# Altium PCB PCB_LoRaTC_V1.PcbDoc
Units mm, origin at the board's own origin, x right, y up, seen from the top; angles counter-clockwise.
Board outline 100.06 x 93.82 mm, 2 copper layers (Top Layer, Bottom Layer); 81 components, 64 nets, 233 pads, 38 vias.
Unrouted connection lines stored in the file: 25.
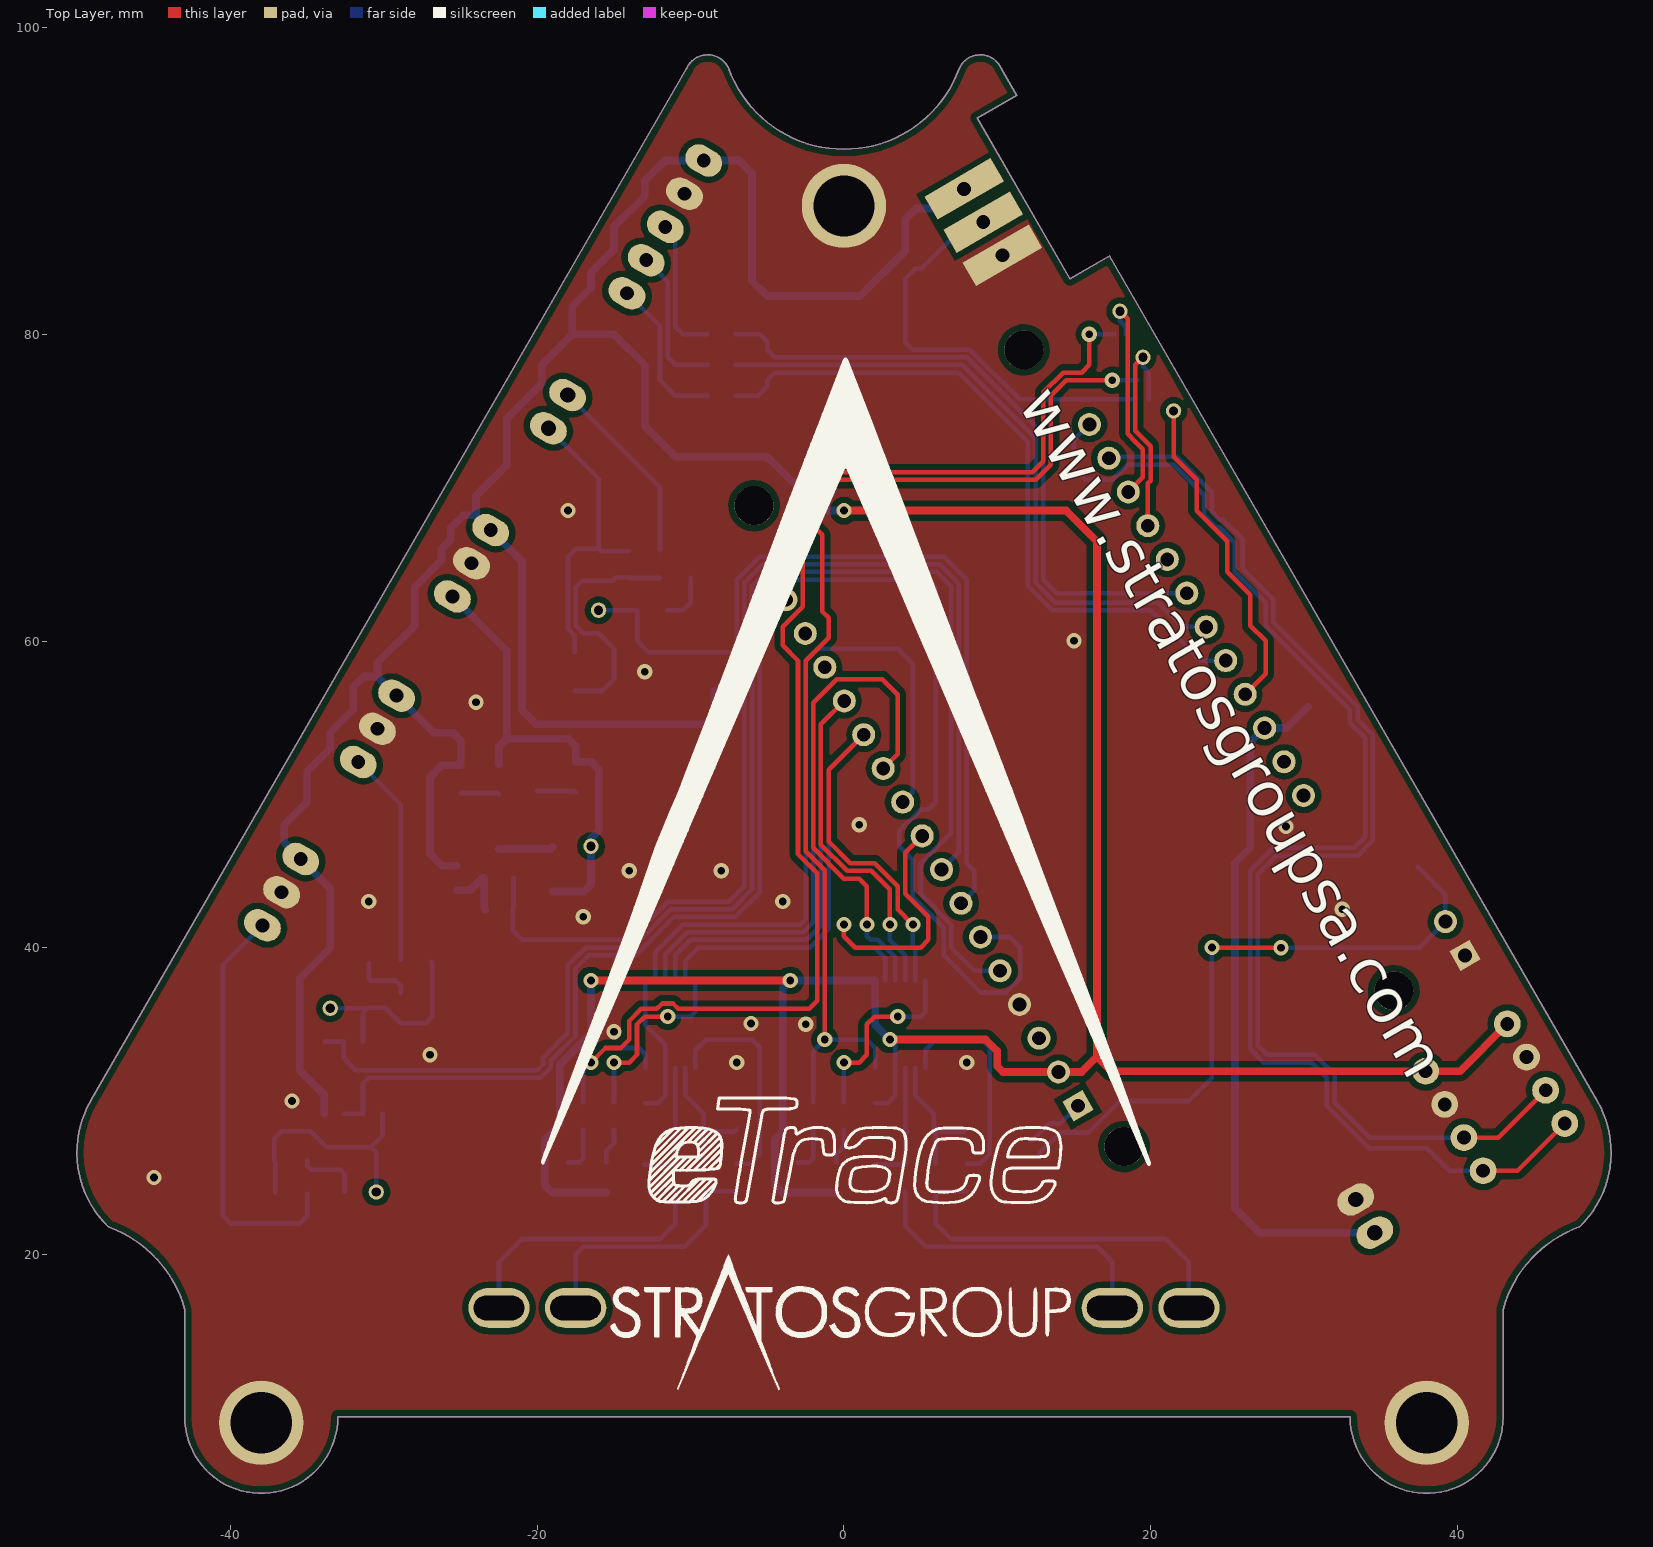
[diagram p0: Top Layer view]
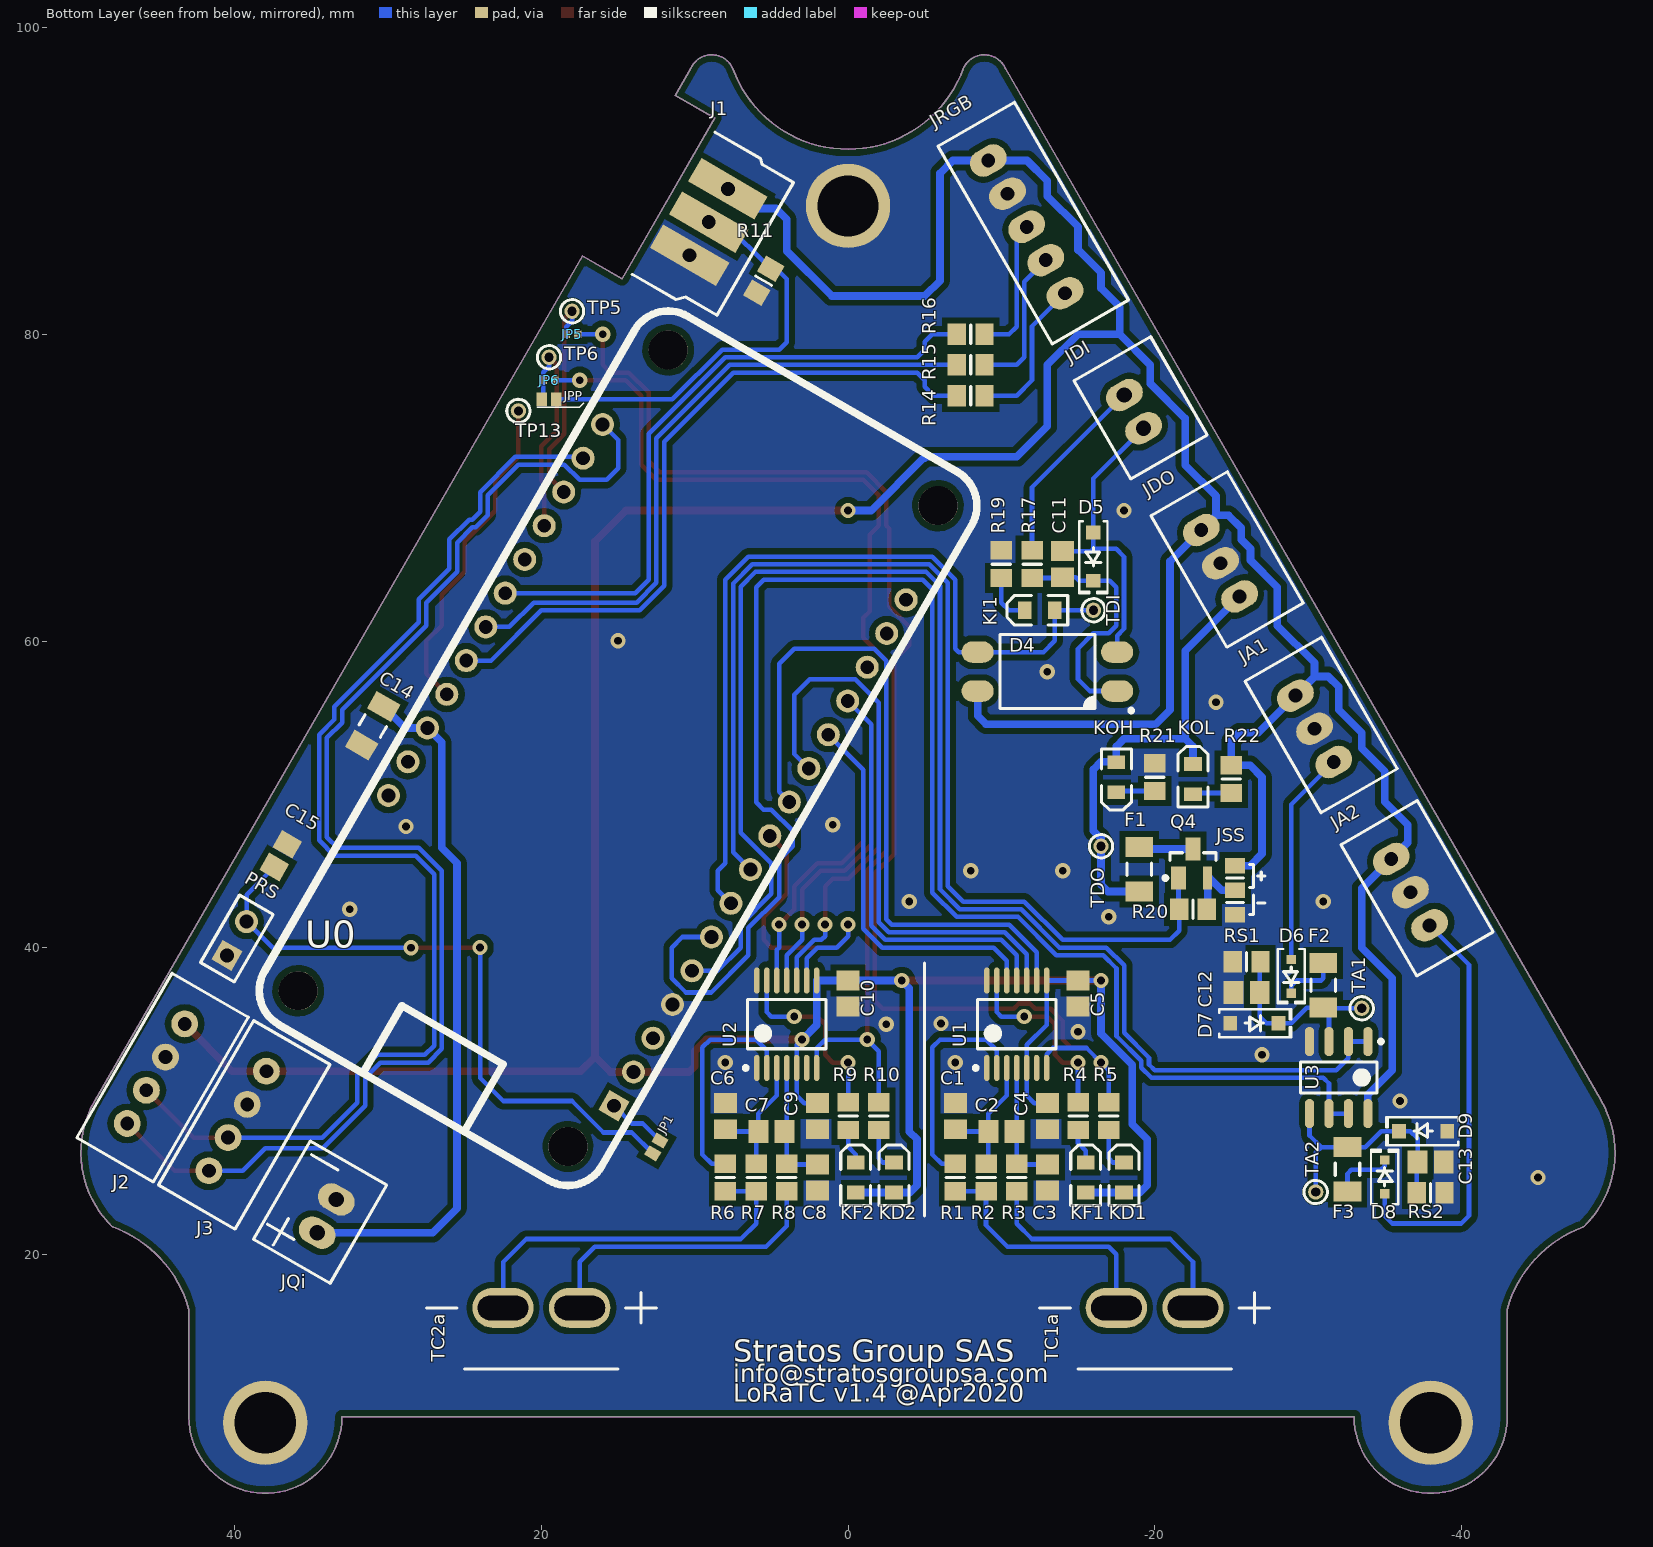
[diagram p1: Bottom Layer view, seen from below]

## Layer stack, top to bottom
Top Solder: solder mask 0.0102, Solder Resist, Dk 3.5
Top Layer: signal copper 0.0356
Dielectric 1: dielectric 0.32, FR-4, Dk 4.8
Bottom Layer: signal copper 0.0356
Bottom Solder: solder mask 0.0102, Solder Resist, Dk 3.5

## Board outline
-43,9.41 -43,16.41 -42.992,16.412 ccw(c-50.7,14.271) -47.964,21.788 cw(c-43.291,26.643) -49.136,29.997 -49.129,30.022 -10.266,97.335 cw(c-8.89,96.733) -7.518,97.343 ccw(c0,100.079) 7.517,97.343 7.514,97.335 cw(c8.89,96.733) 10.262,97.343 11.272,95.594 11.272,95.592 8.693,94.103 14.743,83.624 17.322,85.113 49.129,30.013 49.136,29.998 cw(c43.291,26.643) 47.965,21.789 47.963,21.797 ccw(c50.7,14.279) 42.989,16.41 42.989,9.399 cw(c38,9.399) 33.01,9.399 33,9.41 -33,9.41 cw(c-38,9.41)

## Design rules (kind name [scope] priority, off if disabled: settings)
Clearance Clearance_PolyGND [(InPolygon AND InNet('GND'))] p1: gap=0.4 ignorepadtopadclearanceinfootprint=FALSE except(0: Arc-Hole Track-Hole SMDPad-Hole THPad-Hole Via-Hole Fill-Hole Poly-Hole Region-Hole Text-Hole)
Clearance Clearance_RGBLed [HasFootprint('RGB_LED_5MM')] p2: gap=0.16 ignorepadtopadclearanceinfootprint=FALSE except(0: Arc-Hole Track-Hole SMDPad-Hole THPad-Hole Via-Hole Fill-Hole Poly-Hole Region-Hole Text-Hole)
Clearance Clearance_JSMD [HasFootprint('JUMPER SMD1')] p3: gap=0.15 ignorepadtopadclearanceinfootprint=FALSE
Clearance [All] p4: gap=0.2 ignorepadtopadclearanceinfootprint=FALSE except(0: Arc-Hole Track-Hole SMDPad-Hole THPad-Hole Via-Hole Fill-Hole Poly-Hole Region-Hole Text-Hole)
ComponentClearance ComponentClearance_I2CHeader [InComponent('J2') vs InComponent('J3')] p1: gap=0 collisioncheckmode=3 verticalgap=0 showdistances=FALSE
ComponentClearance ComponentClearance_TC1 [InComponent('TC1') vs InComponent('TC1a')] p2: gap=0 collisioncheckmode=3 verticalgap=0 showdistances=FALSE
ComponentClearance ComponentClearance_TC2 [InComponent('TC2') vs InComponent('TC2a')] p3: gap=0 collisioncheckmode=3 verticalgap=0 showdistances=FALSE
ComponentClearance ComponentClearance_J1 [InComponent('J1')] p4: gap=0 collisioncheckmode=3 verticalgap=0 showdistances=FALSE
ComponentClearance ComponentClearance_LoRa32u4II [InComponent('U0')] p5: gap=0 collisioncheckmode=3 verticalgap=0 showdistances=FALSE
ComponentClearance [All] p6: gap=0.254 collisioncheckmode=3 verticalgap=0.254 showdistances=FALSE
HoleSize [All] p1: absolutevalues=TRUE maxlimit=4 minlimit=0.3 maxpercent=80.000 minpercent=20.000
MinimumSolderMaskSliver [All] p1: minsoldermaskwidth=0
PolygonConnect [All] p1: connectstyle=Direct reliefconductorwidth=0.254 reliefentries=4 polygonreliefangle="90 Angle" airgapwidth=0.254
RoutingCorners [All] p1: cornerstyle=45-Degree minsetback=2.5 maxsetback=2.5
RoutingVias [All] p1: holewidth=0.5 width=1 viastyle="Through Hole" minholewidth=0.3 minwidth=0.6 maxholewidth=1 maxwidth=2
SilkToSilkClearance [All] p1 off: silktosilkclearance=0
SilkToSolderMaskClearance [IsPad] p1 off: minsilkscreentomaskgap=0 clearancetoexposedcopper=TRUE
SolderMaskExpansion [All] p1: expansion=0.102
Width Width_JSMD [HasFootprint('JUMPER SMD1')] p1: maxlimit=0.3 minlimit=0.15 preferedwidth=0.3
Width [All] p2: maxlimit=1 minlimit=0.1 preferedwidth=0.3
24 further rules are at their usual default settings.

## Classes and differential pairs
component class TC_Stage2: C6 C7 C8 C9 C10 KD2 KF2 R6 R7 R8 R9 R10 TC2a U2
component class TC_Stage1: C1 C2 C3 C4 C5 KD1 KF1 R1 R2 R3 R4 R5 TC1a U1
component class RGB_Status: JRGB R14 R15 R16
component class Main: C14 C15 J1 J2 J3 JP1 JP5 JP6 JPP JQi PRS R11 TP5 TP6 TP13 U0
component class Analog_Input: C12 C13 D6 D7 D8 D9 F2 F3 JA1 JA2 RS1 RS2 TA1 TA2 U3
component class Digital_Input_Output: C11 D4 D5 F1 JDI JDO JSS KI1 KOH KOL Q4 R17 R19 R20 R21 R22 TDI TDO
net class PWR: 5V DO1 GND NetF1_1 NetJSS_2

## Components (designator, comment, footprint, x,y, rotation, side; value= is the part's Value field where it differs from the comment)
C1 "Cap" CAPC2012N -7,29.01 r90 bottom value=0.01uF
C2 "Cap" CAPC2012N -10,28.01 r180 bottom value=0.1uF
C3 "Cap" CAPC2012N -13,25.01 r270 bottom value=0.01uF
C4 "Cap" CAPC2012N -13,29.01 r270 bottom value=0.1uF
C5 "Cap" CAPC2012N -15,37.01 r270 bottom value=0.1uF
C6 "Cap" CAPC2012N 8,29.01 r90 bottom value=0.01uF
C7 "Cap" CAPC2012N 5,28.01 r180 bottom value=0.1uF
C8 "Cap" CAPC2012N 2,25.01 r270 bottom value=0.01uF
C9 "Cap" CAPC2012N 2,29.01 r270 bottom value=0.1uF
C10 "Cap" CAPC2012N 0,37.01 r270 bottom value=0.1uF
C11 "Cap" CAPC2012N -14,65.01 r90 bottom value=0.1uF
C12 "Cap" CAPC2012N -26,37.08 r0 bottom value=0.1uF
C13 "Cap" CAPC2012N -38,26.032 r180 bottom value=0.1uF
C14 "Cap Tantalum" CAPC3216N 31,54.467 r300 bottom value=10uF/10V
C15 "Cap" CAPC2012N 37,46 r120 bottom value=0.1uF
D4 "Opto SMD" "LITEON LTV-817" -13,58.01 r0 bottom
D5 "5.1V@500mW" SOD-123 -16,65.51 r270 bottom
D6 "Rectifier SOD323" SOD323F -28.905,38.134 r270 bottom
D7 "3.3V@500mW" SOD-123 -26.5,35.08 r180 bottom
D8 "Rectifier SOD323" SOD323F -35,25.047 r90 bottom
D9 "3.3V@500mW" SOD-123 -37.5,28.032 r0 bottom
F1 "FUSE PTC 0.05A" RESC3216N -19,45.118 r270 bottom
F2 "FUSE PTC 0.05A" RESC3216N -31,37.547 r270 bottom
F3 "FUSE PTC 0.05A" RESC3216N -32.575,25.547 r90 bottom
J1 "TTP223" "JST XH B3B-XH-A"#1 9.085,87.327 r300 bottom
J2 "Si7021" "JST XH B4B-XH-A" 45.14,31.784 r120 bottom
J3 "Oled" "JST XH B4B-XH-A" 39.811,28.7 r120 bottom
JA1 "Header 2.54 mm" "JST XH B3B-XH-A"#2 -30.425,54.275 r60 bottom
JA2 "Header 2.54 mm" "JST XH B3B-XH-A"#2 -36.675,43.622 r60 bottom
JDI "Header 2.54 mm" "JST XH B2B-XH-A" -18.65,74.962 r60 bottom
JDO "Header 2.54 mm" "JST XH B3B-XH-A"#2 -24.29,65.075 r60 bottom
JP1 "Jumper SMD" "JUMPER SMD2"#1 12.5,27 r300 bottom
JP5 "Jumper SMD" "JUMPER SMD2"#2 18,80.01 r0 bottom
JP6 "Jumper SMD" "JUMPER SMD2"#2 19.5,77.01 r0 bottom
JPP "Jumper SMD" "JUMPER SMD2"#1 19.5,75.76 r0 bottom
JQi "Header 2.54 mm" "JST XH B2B-XH-A" 34,22.5 r300 bottom
JRGB "Header 5" "JST XH B5B-XH-A" -11.65,87.01 r60 bottom
JSS "Source selector" JumpRes_3a -25.25,43.743 r180 bottom
KD1 "LED_SMD" 2.0X1.25X1.2 -18,25.01 r90 bottom
KD2 "LED_SMD" 2.0X1.25X1.2 -3,25.01 r90 bottom
KF1 "LED_SMD" 2.0X1.25X1.2 -15.5,25.01 r90 bottom
KF2 "LED_SMD" 2.0X1.25X1.2 -0.5,25.01 r90 bottom
KI1 "LED_SMD" 2.0X1.25X1.2 -12.5,62.01 r0 bottom
KOH "LED_SMD" 2.0X1.25X1.2 -17.5,51.118 r270 bottom
KOL "LED_SMD" 2.0X1.25X1.2 -22.5,50.993 r90 bottom
PRS "Reset Header" HDR1X2#1 40.5,39.5 r120 bottom
Q4 "MOSFET-P" SOT23-3N -22.5,45.493 r90 bottom
R1 "Res1" RESC2012N -7,25.01 r270 bottom value=0.0
R2 "Res1" RESC2012N -9,25.01 r270 bottom value=0.0
R3 "Res1" RESC2012N -11,25.01 r270 bottom value=0.0
R4 "Res1" RESC2012N -15,29.01 r90 bottom value=1k
R5 "Res1" RESC2012N -17,29.01 r90 bottom value=1k
R6 "Res1" RESC2012N 8,25.01 r270 bottom value=0.0
R7 "Res1" RESC2012N 6,25.01 r270 bottom value=0.0
R8 "Res1" RESC2012N 4,25.01 r270 bottom value=0.0
R9 "Res1" RESC2012N 0,29.01 r90 bottom value=1k
R10 "Res1" RESC2012N -2,29.01 r90 bottom value=1k
R11 "Res1" RESC2012N 5.5,83.5 r300 bottom value=100K
R14 "Res1" RESC2012N -8,76.01 r0 bottom value=1k
R15 "Res1" RESC2012N -8,78.01 r0 bottom value=1k
R16 "Res1" RESC2012N -8,80.01 r0 bottom value=1k
R17 "Res1" RESC2012N -12,65.01 r90 bottom value=4.7k
R19 "Res1" RESC2012N -10,65.01 r90 bottom value=1k
R20 "Res1" RESC2012N -22.5,42.493 r180 bottom value=100K
R21 "Res1" RESC2012N -20,51.118 r270 bottom value=1K
R22 "Res1" RESC2012N -25,50.993 r90 bottom value=1K
RS1 "Res1" RESC2012N -26,39.08 r0 bottom value="100 0.1%"
RS2 "Res1" RESC2012N -38,24.032 r180 bottom value="100 0.1%"
TA1 "Test Point" "TESTPOINT_1 - THT" -33.5,36.047 r180 bottom
TA2 "Test Point" "TESTPOINT_1 - THT" -30.5,24.067 r180 bottom
TC1a "Terminal Block 5mm" HDR1X2#2 -22.5,16.51 r0 bottom
TC2a "Terminal Block 5mm" HDR1X2#2 17.5,16.51 r0 bottom
TDI "Test Point" "TESTPOINT_1 - THT" -16,62.01 r180 bottom
TDO "Test Point" "TESTPOINT_1 - THT" -16.5,46.618 r0 bottom
TP5 "Test Point" "TESTPOINT_1 - THT" 18,81.51 r180 bottom
TP6 "Test Point" "TESTPOINT_1 - THT" 19.5,78.51 r180 bottom
TP13 "Test Point" "TESTPOINT_1 - THT" 21.5,75.01 r180 bottom
U0 "LoRa32u4 II" LoRa32u4_II 15,53.01 r30 bottom
U1 "MAX31856" TSSOP14_N -11,35.01 r90 bottom
U2 "MAX31856" TSSOP14_N 4,35.01 r90 bottom
U3 "LM358DR" D008_L -32,31.532 r270 bottom

## Footprints (in the part's own frame and the unit in brackets; to place one, negate y for a bottom-side part, rotate by r counter-clockwise, add the part's x,y. Pads: shape width x height; smd on the part's side, far side on the other; paste and mask are expansions set on the pad)
2.0X1.25X1.2 [mm] "SM LED; 2 Flat Leads"
  rect 0.9x1.15 smd: 1(-0.98,0) 2(0.98,0)
  silkscreen extent -1.83,-0.98 2.13,0.98
CAPC2012N [mm] "Chip Capacitor, Body 2.0x1.3mm, IPC Medium Density"
  rect 1.3x1.5 smd: 1(-0.85,0) 2(0.85,0)
  body extent -1.1,-0.72 1.1,0.73, height 1.1
CAPC3216N [mm] "Chip Capacitor, Body 3.2x1.6mm, IPC Medium Density"
  rect 1.3x1.8 smd: 1(-1.45,0) 2(1.45,0)
  silkscreen extent -0.4,-0.8 0.4,0.8, body extent -1.7,-0.9 1.7,0.9, height 1.35
D008_L [mm] "SOIC, 8-Leads, Body 4.9x3.9mm, Pitch 1.27mm, IPC High Density"
  oval 1.9x0.6 smd: 1(-2.35,1.905) 2(-2.35,0.635) 3(-2.35,-0.635) 4(-2.35,-1.905) 5(2.35,-1.905) 6(2.35,-0.635) 7(2.35,0.635) 8(2.35,1.905)
  silkscreen extent -2.47,-2.5 1,2.88, body extent -2,-2.5 2,2.5, height 1.75
HDR1X2#1 [mm] "Connector; Header; 2 Position"
  rect 1.5x1.5 hole 0.9: 1(0,0)
  round 1.5 hole 0.9: 2(2.54,0)
  silkscreen extent -1.27,-1.27 3.81,1.27
HDR1X2#2 [mm] "Connector; Header; 2 Position"
  oval 4x2.6 hole 1.6 slot 3.3 at 0 deg: 1(0,0) 2(5,0)
  silkscreen extent -2.5,4 7.5,4
"JST XH B2B-XH-A" [mm]
  oval 1.75x2.5 hole 1: 1(-1.25,0) 2(1.25,0)
  silkscreen extent -3.7,-3.38 3.7,2.38, body extent -3.7,-3.37 3.7,2.38, height 7
"JST XH B3B-XH-A"#1 [mm]
  rect 1.75x5 hole 0.9: 1(-2.5,0) 2(0,0) 3(2.5,0)
  silkscreen extent -5.28,-2.62 5.45,3.5
"JST XH B3B-XH-A"#2 [mm]
  oval 1.75x2.5 hole 0.9: 1(-2.5,0) 2(0,0) 3(2.5,0)
  silkscreen extent -4.95,-3.38 4.95,2.38, body extent -4.95,-3.37 4.95,2.38, height 7
"JST XH B4B-XH-A" [mm]
  round 1.75 hole 0.9: 1(-3.75,0) 2(-1.25,0) 3(1.25,0) 4(3.75,0)
  silkscreen extent -6.2,-3.38 6.2,2.38, body extent -6.2,-3.37 6.2,2.38, height 7
"JST XH B5B-XH-A" [mm]
  oval 1.75x2.5 hole 0.9: 1(-5,0) 2(-2.5,0) 3(0,0) 4(2.5,0) 5(5,0)
  silkscreen extent -7.45,-3.38 7.45,2.38, body extent -7.45,-3.37 7.45,2.38, height 7
"JUMPER SMD2"#1 [mm] "JUMPER DE MONTAJE SUPERFICIAL"
  rect 0.7x0.9 smd: 1(-0.475,0) 2(0.475,0)
"JUMPER SMD2"#2 [mm] "JUMPER DE MONTAJE SUPERFICIAL"
  rect 0.5x0.5 smd: 1(-0.375,0) 2(0.375,0)
JumpRes_3a [mm] "Jumper Connection 2 Resistor SMD0805"
  rect 1.3x1 smd: 1(0,1.6) 2(0,0) 3(0,-1.6)
  silkscreen extent -0.55,-0.8 0.55,0.8, body extent -0.62,-0.2 0.63,1.8, height 0.78
"LITEON LTV-817" [mm] "SOP, 4-Leads, Body 4.60x6.50mm, Pitch 2.54mm, IPC Medium Density"
  oval 2.1x1.4 smd: 1(-4.55,1.27) 2(-4.55,-1.27) 3(4.55,-1.27) 4(4.55,1.27)
  silkscreen extent -5.59,-2.41 3.1,2.66, body extent -5.1,-2.3 5.1,2.3, height 3.85
LoRa32u4_II [mm] "LoRa32u4 II Module"
  round 2.54 hole 2.54: 0(-10.16,-24.13) 0(-10.16,24.13) 0(10.16,-24.13) 0(10.16,24.13)
  rect 1.5x1.5 hole 0.9: 1(-11.43,20.32)
  round 1.5 hole 0.9: 2(-11.43,17.78) 3(-11.43,15.24) 4(-11.43,12.7) 5(-11.43,10.16) 6(-11.43,7.62) 7(-11.43,5.08) 8(-11.43,2.54) 9(-11.43,0) 10(-11.43,-2.54) 11(-11.43,-5.08) 12(-11.43,-7.62) 13(-11.43,-10.16) 14(-11.43,-12.7) 15(-11.43,-15.24) 16(-11.43,-17.78) 17(11.43,-17.78) 18(11.43,-15.24) 19(11.43,-12.7) 20(11.43,-10.16) 21(11.43,-7.62) 22(11.43,-5.08) 23(11.43,-2.54) 24(11.43,0) 25(11.43,2.54) 26(11.43,5.08) 27(11.43,7.62) 28(11.43,10.16)
  silkscreen extent -12.7,-26.67 12.7,26.67
RESC2012N [mm] "Chip Resistor, Body 2.0x1.3mm, IPC Medium Density"
  rect 1.2x1.4 smd: 1(-0.9,0) 2(0.9,0)
  silkscreen extent 0,-0.6 0,0.6, body extent -1.08,-0.7 1.07,0.7, height 0.65
RESC3216N [mm] "Chip Resistor, Body 3.2x1.6mm, IPC Medium Density"
  rect 1.3x1.8 smd: 1(-1.45,0) 2(1.45,0)
  silkscreen extent -0.4,-0.8 0.4,0.8, body extent -1.68,-0.87 1.68,0.87, height 0.71
SOD323F [mm] "SODFL, 2-Leads, Body 1.25x2.50mm, IPC Medium Density"
  rect 0.6x0.6 smd: 1(-1.1,0) 2(1.1,0)
  silkscreen extent -1.78,-0.89 1.78,0.89, body extent -1.25,-0.62 1.25,0.63, height 0.8
SOD-123 [mm] "SOD, 2-Leads, Body 1.55x3.70mm, IPC Medium Density"
  rect 0.9x0.95 smd: 1(-1.575,0) 2(1.575,0)
  silkscreen extent -2.3,-0.92 2.41,0.92, body extent -1.86,-0.78 1.86,0.77, height 1.35
SOT23-3N [mm] "SOT23, 3-Leads, Body 2.9x1.3mm, Pitch 0.95mm, Lead Span 2.5mm, IPC Medium Density"
  rect 1.5x1 smd: 1(-0.95,0.95) 3(0.95,0)
  rect 1.5x0.6 smd: 2(-0.95,-0.95)
  silkscreen extent -1.07,-1.5 0.7,1.93, body extent -0.7,-1.5 0.7,1.5, height 1.1
"TESTPOINT_1 - THT" [mm] "Test Point Through Hole - Hole: 0.6 mm"
  round 1 hole 0.6: PAD(0,0)
  silkscreen extent -0.76,-0.76 0.76,0.76
TSSOP14_N [mm] "TSOP, 14-Leads, Body 5x4.4mm, Pitch 0.65mm, IPC Medium Density"
  oval 1.7x0.35 smd: 1(-2.85,1.95) 2(-2.85,1.3) 3(-2.85,0.65) 4(-2.85,0) 5(-2.85,-0.65) 6(-2.85,-1.3) 7(-2.85,-1.95) 8(2.85,-1.95) 9(2.85,-1.3) 10(2.85,-0.65) 11(2.85,0) 12(2.85,0.65) 13(2.85,1.3) 14(2.85,1.95)
  silkscreen extent -2.97,-2.55 1.6,2.8, body extent -2.25,-2.55 2.25,2.55, height 1.1

## Part data
C1 C3 C6 C8: "Capacitor", Supplier Part Number 1=1276-1015-1-ND, LatestRevisionDate=17-Jul-2002, LatestRevisionNote="Re-released for DXP Platform.", PackageDescription="Radial Cap, Thru-Hole; 2 Leads; 0.3 in Pin Spacing", PackageReference=RAD-0.3, Published=8-Jun-2000, Publisher="Altium Limited", Supplier 1=Digi-Key
C2 C4 C5 C7 C9 C10 C11 C12 C13 C15: "Capacitor", Supplier Part Number 1=1276-1007-1-ND, LatestRevisionDate=17-Jul-2002, LatestRevisionNote="Re-released for DXP Platform.", PackageDescription="Radial Cap, Thru-Hole; 2 Leads; 0.3 in Pin Spacing", PackageReference=RAD-0.3, Published=8-Jun-2000, Publisher="Altium Limited", Supplier 1=Digi-Key
C14: library part "Cap Pol2", "Polarized Capacitor (Axial)", Supplier Part Number 1=478-8193-1-ND, LatestRevisionDate=17-Jul-2002, LatestRevisionNote="Re-released for DXP Platform.", PackageDescription="Polarized Capacitor; 2 Leads", PackageReference=POLAR0.8, Published=8-Jun-2000, Publisher="Altium Limited", Supplier 1=Digi-Key
D4: library part Optoisolator
D5 D7 D9: library part "D Zener", "Zener Diode", LatestRevisionDate=17-Jul-2002, LatestRevisionNote="Re-released for DXP Platform.", PackageDescription="Diode, Thru-Hole; 2 Leads; 0.7 in Pin Spacing", PackageReference=DIODE-0.7, Published=8-Jun-2000, Publisher="Altium Limited", Supplier 1=Digi-Key
D6 D8: library part "Diode 1N4148", "High Conductance Fast Diode", Supplier Part Number 1=1N4148WSFSCT-ND, Code_JEDEC=DO-204-AH, ComponentLink1Description="Manufacturer Link", ComponentLink1URL=http://www.fairchildsemi.com/, ComponentLink2Description=Datasheet, ComponentLink2URL=http://www.fairchildsemi.com/ds/1N%2F1N4148.pdf, DatasheetVersion=1997, LatestRevisionDate=17-Jul-2002, LatestRevisionNote="Re-released for DXP Platform.", PackageDescription="Diode, Axial; Body 3.8 x 1.9 mm (LxDia. max), Lead Dia. 0.53 mm (max)", PackageReference=DO-35, Published=8-Jun-2000, Publisher="Altium Limited", Supplier 1=Digi-Key
F1 F2 F3: library part "Fuse 1", "FUSE PTC RESET 1.500A 24V 1812", Supplier Part Number 1=507-1793-1-ND, LatestRevisionDate=17-Jul-2002, LatestRevisionNote="Re-released for DXP Platform.", PackageDescription="Thru-Hole; 2 Leads", PackageReference=PIN-W2/E2.8, Published=8-Jun-2000, Publisher="Altium Limited", Supplier 1=Digi-Key
J1 JA1 JA2 JDO: library part "3 Pin"
J2 J3: library part "4 Pin"
JDI JQi: library part "2 Pin"
JRGB: "Header, 5-Pin", LatestRevisionDate=17-Jul-2002, LatestRevisionNote="Re-released for DXP Platform.", Publisher="Altium Limited"
JSS: library part Jump_Res3, "Jumper 2 positions"
KD1 KD2 KF1 KF2 KI1 KOH KOL: library part LED2, "Typical RED, GREEN, YELLOW, AMBER GaAs LED", Supplier Part Number 1=475-1410-1-ND, LatestRevisionDate=17-Jul-2002, LatestRevisionNote="Re-released for DXP Platform.", PackageDescription="SM LED; 2 Flat Leads", PackageReference=3.2X1.6X1.1, PackageVersion=Feb-2002, Published=8-Jun-2000, Publisher="Altium Limited", Supplier 1=Digi-Key
PRS TC1a TC2a: library part "Header 2", "Header, 2-Pin", LatestRevisionDate=17-Jul-2002, LatestRevisionNote="Re-released for DXP Platform.", Publisher="Altium Limited"
Q4: "P-Channel MOSFET", Supplier Part Number 1=DMP3099L-7DICT-ND, LatestRevisionDate=17-Jul-2002, LatestRevisionNote="Re-released for DXP Platform.", PackageDescription="TO, Flat Index; 3 In-Line, Axial Leads; Body Dia. 4.6mm; Lead Dia. 0.5 mm (max)", PackageReference=E3, PackageVersion=1995/1996, Published=8-Jun-2000, Publisher="Altium Limited", Supplier 1=Digi-Key
R1 R2 R3 R6 R7 R8: "Resistor", Supplier Part Number 1=CR0805-J/-000ELF, LatestRevisionDate=17-Jul-2002, LatestRevisionNote="Re-released for DXP Platform.", PackageDescription="Axial Device, Thru-Hole; 2 Leads; 0.3 in Pin Spacing", PackageReference=AXIAL-0.3, Published=8-Jun-2000, Publisher="Altium Limited", Supplier 1=Digi-Key
R4 R5 R9 R10 R14 R15 R16 R19: "Resistor", Supplier Part Number 1=P1.00KCCT-ND, LatestRevisionDate=17-Jul-2002, LatestRevisionNote="Re-released for DXP Platform.", PackageDescription="Axial Device, Thru-Hole; 2 Leads; 0.3 in Pin Spacing", PackageReference=AXIAL-0.3, Published=8-Jun-2000, Publisher="Altium Limited", Supplier 1=Digi-Key
R11 R20: "Resistor", Supplier Part Number 1=P100KCCT-ND, LatestRevisionDate=17-Jul-2002, LatestRevisionNote="Re-released for DXP Platform.", PackageDescription="Axial Device, Thru-Hole; 2 Leads; 0.3 in Pin Spacing", PackageReference=AXIAL-0.3, Published=8-Jun-2000, Publisher="Altium Limited", Supplier 1=Digi-Key
R17: "Resistor", Supplier Part Number 1=P4.70KCCT-ND, LatestRevisionDate=17-Jul-2002, LatestRevisionNote="Re-released for DXP Platform.", PackageDescription="Axial Device, Thru-Hole; 2 Leads; 0.3 in Pin Spacing", PackageReference=AXIAL-0.3, Published=8-Jun-2000, Publisher="Altium Limited", Supplier 1=Digi-Key
R21 R22: "Resistor", Supplier Part Number 1=P1.0KACT-ND, LatestRevisionDate=17-Jul-2002, LatestRevisionNote="Re-released for DXP Platform.", PackageDescription="Axial Device, Thru-Hole; 2 Leads; 0.3 in Pin Spacing", PackageReference=AXIAL-0.3, Published=8-Jun-2000, Publisher="Altium Limited", Supplier 1=Digi-Key
RS1 RS2: "Resistor", Supplier Part Number 1=RG20P100BCT-ND, LatestRevisionDate=17-Jul-2002, LatestRevisionNote="Re-released for DXP Platform.", PackageDescription="Axial Device, Thru-Hole; 2 Leads; 0.3 in Pin Spacing", PackageReference=AXIAL-0.3, Published=8-Jun-2000, Publisher="Altium Limited", Supplier 1=Digi-Key
TA1 TA2 TDI TDO TP5 TP6 TP13: library part TestPoint
U0: library part LoRa32u4_II_2, "Based on Adafruit Feather LoRa"
U1 U2: "Precision Thermocouple to Digital Converter with Linearization", Supplier Part Number 1=MAX31856MUD+-ND, Supplier 1=Digi-Key
U3: "Dual Operational Amplifier", Supplier Part Number 1=296-1014-1-ND, Code_IPC=SOIC127P600-8, ComponentLink1Description="Manufacturer Link", ComponentLink1URL=http://www.ti.com/, ComponentLink2Description=Datasheet, ComponentLink2URL=http://www-s.ti.com/sc/ds/lm358.pdf, DatasheetVersion=Aug-1988, LatestRevisionDate=13-Apr-2006, LatestRevisionNote="IPC-7351 Footprint Added.", PackageDescription="8-Pin Small Outline Integrated Circuit 1.27 mm Pitch", PackageReference=D008, PackageVersion=Jan-1998, Published=15-Apr-2002, Publisher="Altium Limited", Supplier 1=Digi-Key

## Free pads (board coordinates)
  round 5.5 hole 4: 0(-38,9.01) 0(0,88.379) 0(38,9.01)

## Via types
v1: diameter 1, hole 0.5, Top Layer to Bottom Layer, 38 vias

## Nets (pads, with @x,y where several pads share a name; then routed paths per layer and width w, separated by ;. In a path a pad name is that pad's centre, name@x,y a point inside that pad or via, vN(x,y) a via of type N, cw(c..) or ccw(c..) an arc to the next point about the centre after c; other vN are vias at no path point)
2: J2.1 J3.1 U0.17 | length 86.3
  Top Layer w0.3: J3.1 43.932,25.452 J2.1
  Bottom Layer w0.3: U0.17 15,73.114 15,71.26 15.75,70.51 17.5,70.51 18.5,71.51 21.5,71.51 23.5,69.51 23.5,68.217 24.293,67.424 24.5,67.424 25.5,66.424 25.5,64.51 27.5,62.51 27.5,61.01 33,55.51 33,55.091 33,54.677 33.99,53.687 33.99,47.207 33.293,46.51 28,46.51 26.5,45.01 26.5,33.401 27.391,32.51 30.5,32.51 31.5,31.51 31.5,29.693 34.262,26.931 38,26.931 39.478,25.452 J3.1
3: J2.2 J3.2 U0.18 | length 78.1
  Top Layer w0.3: J3.2 42.682,27.617 J2.2
  Bottom Layer w0.3: U0.18@17.279,71.923 17.365,72.01 21.707,72.01 24,69.717 24,68.424 24.5,67.924 24.707,67.924 26,66.631 26,64.717 28,62.717 28,61.217 33.5,55.717 33.5,54.884 34.49,53.894 34.49,47 33.5,46.01 28.207,46.01 27,44.803 27,33.608 27.598,33.01 30.707,33.01 32,31.717 32,29.9 34.282,27.617 J3.2
3V3: C4.1 C5.1 C9.1 C10.1 D4.4 J1.1 J2.4 J3.4 JA1.3 JA2.3 JDO.3 JRGB.5 JSS.1 KD1.1 KD2.1 KF1.1 KF2.1 R22.2 U0.2 U1.5 U1.8 U2.5 U2.8 U3.8 | length 351.6
  Top Layer w0.5: v1(-16.5,37.86) v1(-3.5,37.86) ; v1(0,68.51) 10,68.51 14.5,68.51 16.5,66.51 16.5,32.897 ; v1(3,34.01) 9.25,34.01 10,33.26 10,32.26 10.363,31.897 15.5,31.897 16.5,32.897 ; J2.4 40.182,31.948 J3.4 17.449,31.948 16.5,32.897
  Bottom Layer w0.3: v1(-16.5,37.86) C5.1 U1.8 -12.95,34.96 -11.65,33.66 U1.5 -11.65,30.36 -12.15,29.86 C4.1 ; C9.1 2.85,29.86 3.35,30.36 U2.5 v1@3.35,33.66
  Bottom Layer w0.5: U3.8 -33.905,30.415 -35.5,32.01 -35.5,38.01 -33.5,40.01 -33.5,43.863 JA2.3 -36.5,46.863 -36.5,48.01 -35,49.51 -35,51.51 -33.5,53.01 -33.5,54.01 -32,55.51 -32,57.01 -31.32,57.69 -30.425,57.69 ; JSS.1 -26.225,45.343 -27,46.118 -27,51.118 -26.225,51.893 R22.2 -25,53.51 -25.5,54.01 -26.745,54.01 JA1.3 -30.425,57.69 ; v1(-16.5,37.86) -16.5,34.402 -18.525,32.377 -18.525,28.485 -19.51,27.5 -19.51,24.52 -19.02,24.03 KD1.1 KF1.1 ; D4.4 -8.45,55.122 -9,54.572 -20.062,54.572 -21,55.51 -21,65.201 JDO.3 -24,68.201 ; KF2.1 KD2.1 -4.02,24.03 -4.5,24.51 -4.5,27.51 -4,28.01 -4,37.36 v1(-3.5,37.86) C10.1 U2.8 2.05,34.96 v1(3,34.01) ; v1(0,68.51) -1.5,68.51 -4.914,71.923 -5,71.923 -5.087,72.01 -11,72.01 -13,74.01 -13,78.01 -15,80.01 -17.71,80.01 ; J1.1 6.556,88.213 4.702,88.213 4,87.51 4,85.439 1.071,82.51 -5,82.51 -6,83.51 -6,90.51 -6.831,91.34 JRGB.5 -11.67,91.34 -13,90.01 -13,89.01 -15,87.01 -15,85.51 -16.5,84.01 -16.5,83.01 -17.71,81.801 -17.71,80.01 ; -30.425,57.69 -30.425,58.585 -28,61.01 -28,63.51 -26.25,65.261 -26.25,66.01 -25.635,66.625 -25.635,67.375 -24.809,68.201 -24,68.201 ; -24,68.201 -24,69.46 -22,71.46 -22,74.51 -19.714,76.796 -19.714,78.005 -17.71,80.01
5: JP5.2 TP5.PAD U0.19 | length 14.5
  Top Layer w0.3: TP5.PAD 18.5,81.01 18.5,73.51 19,73.01 19.5,72.51 19.5,70.674 U0.19@18.549,69.724
  Bottom Layer w0.3: TP5.PAD 18,80.885 18.375,80.51 JP5.2
5V: C14.1 JQi.2 U0.26 | length 45.3
  Bottom Layer w0.5: C14.1 28.878,54.326 U0.26 26.5,53.387 26.5,46.51 25.5,45.51 25.5,23 27.083,21.417 JQi.2
6: JP6.2 JPP.2 TP6.PAD U0.20 | length 14.6
  Top Layer w0.3: TP6.PAD 19,78.01 19,73.717 20,72.717 20,70.467 19.819,70.286 U0.20@19.819,67.524
  Bottom Layer w0.3: TP6.PAD 19.5,77.915 19.875,77.54 JP6.2 JPP.2@19.875,75.76
9: U0.21
10: R16.2 U0.22 | length 42.3
  Bottom Layer w0.3: R16.2 -5.5,80.01 -5,79.51 -5,79.01 -4.5,78.51 8,78.51 13,73.51 13,64.01 13.885,63.124 U0.22@22.359,63.124
11: R15.2 U0.23 | length 43.3
  Bottom Layer w0.3: R15.2 7.707,78.01 12.5,73.217 12.5,63.803 13.792,62.51 20.5,62.51 22.085,60.925 U0.23@23.629,60.925
12: R14.2 U0.24 | length 46.2
  Bottom Layer w0.3: R14.2 -5.586,76.01 -5,76.596 -5,77.01 -4.5,77.51 7.5,77.51 12,73.01 12,63.596 13.585,62.01 20,62.01 23.285,58.725 U0.24@24.899,58.725
13: TP13.PAD U0.25 | length 21.5
  Top Layer w0.3: TP13.PAD 21.5,72.01 23,70.51 23,68.51 25,66.51 25,64.51 26.5,63.01 26.5,61.01 27.5,60.01 27.5,57.856 U0.25@26.169,56.525
14: U0.16
A0: U0.5 U3.1 U3.2 | length 99.6
  Bottom Layer w0.3: U3.1 U3.2 -32.635,32.795 -31.85,32.01 -20,32.01 -19.625,32.385 -19.625,32.833 -18.01,34.448 -18.01,38.85 -16.85,40.01 -13.793,40.01 -11.293,42.51 -7.293,42.51 -6,43.803 -6,63.596 -5.086,64.51 6.036,64.51 7,63.547 7,47.51 5,45.51 5,43.51 7,41.51 7,40.01 8.514,38.496 U0.5
A1: U0.6 U3.6 U3.7 | length 106.6
  Bottom Layer w0.3: U3.7 U3.6 -31.365,31.145 -31,31.51 -19.793,31.51 -19.125,32.178 -19.125,32.626 -17.51,34.241 -17.51,38.643 -16.643,39.51 -13.586,39.51 -11.086,42.01 -7.5,42.01 -7.086,42.01 -5.5,43.596 -5.5,63.389 -4.879,64.01 5.5,64.01 6,63.51 6,61.01 6,49.495 5.515,49.01 5,49.01 3.605,47.616 3.605,46.618 4.5,45.723 4.5,43.303 6.5,41.303 6.5,39.51 8.93,37.08 10.569,37.08 11.5,38.01 11.5,40.01 10.814,40.696 U0.6
A2: D4.3 KI1.1 TDI.PAD U0.7 | length 53.8
  Bottom Layer w0.3: TDI.PAD KI1.1 -13.48,60.01 -12.75,59.28 D4.3 -7.23,59.28 -7,59.51 -7,64.01 -5.5,65.51 6.5,65.51 8,64.01 8,45.51 8.5,45.01 8.5,43.754 U0.7
A3: Q4.1 R20.1 U0.8 | length 74.2
  Bottom Layer w0.3: Q4.1 -21.55,42.543 R20.1 -21.6,41.109 -21,40.51 -14,40.51 -11.5,43.01 -7.5,43.01 -6.5,44.01 -6.5,63.803 -5.293,65.01 6.243,65.01 7.5,63.754 7.5,46.223 U0.8
A4: U0.9 U2.9 | length 20.1
  Top Layer w0.3: v1(0,41.51) 0,40.76 0.75,40.01 5,40.01 5.5,40.51 5.5,42.01 4,43.51 4,46.194 U0.9
  Bottom Layer w0.3: v1(0,41.51) 0,40.76 0.75,40.01 2,40.01 2.7,39.31 U2.9
A5: U0.10 U1.9 | length 46.4
  Bottom Layer w0.3: U1.9 -12.3,39.71 -10.5,41.51 -4.073,41.51 -2.849,41.51 -2.5,41.859 -2.5,57.631 ; -2.5,57.631 -2.5,58.717 -1.708,59.51 3.5,59.51 4.5,58.51 4.5,50.163 U0.10
AI1+: D6.1 JA1.1 | length 14
  Bottom Layer w0.3: JA1.1 -28.905,49.34 D6.1
AI2+: D8.1 JA2.1 | length 27.4
  Bottom Layer w0.3: JA2.1 -40.5,38.882 -40.5,22.51 -40,22.01 -35.5,22.01 -35,22.51 D8.1
AREF: U0.3
BIAS1: R1.1 U1.2 | length 14.6
  Bottom Layer w0.3: U1.2 -9.7,33.31 -9,34.01 -6,34.01 -5.5,33.51 -5.5,26.51 -6.1,25.91 R1.1
BIAS2: R6.1 U2.2 | length 14.6
  Bottom Layer w0.3: U2.2 5.3,33.31 6,34.01 9,34.01 9.5,33.51 9.5,26.51 8.9,25.91 R6.1
D\R\D\Y\1\: JP5.1 R5.2 U1.7 | length 88.2
  Top Layer w0.3: v1(-16.5,32.51) -15.55,33.46 -14.55,33.46 -14,34.01 -14,35.217 -13.207,36.01 -12.202,36.01 -11.852,36.36 -11.148,36.36 -10.798,36.01 -2.268,36.01 -1.75,36.528 -1.75,44.846 -3,46.096 -3,58.725 -4,59.725 -4,60.925 -2.689,62.237 -2.689,67.34 -2.5,67.528 -2.5,69.717 -1.208,71.01 12.292,71.01 13,71.717 13,76.217 14.292,77.51 15.5,77.51 16,78.01 v1@16,80.01
  Bottom Layer w0.3: R5.2 -17,32.01 v1(-16.5,32.51) -15.55,33.46 -13.346,33.46 -12.95,33.064 U1.7 ; v1(16.009,80.01) JP5.1
D\R\D\Y\2\: JP6.1 R10.2 U2.7 | length 73.2
  Top Layer w0.3: v1(-1.25,34.01) -1.25,45.053 -2.5,46.303 -2.5,58.718 -1,60.217 -1,61.51 -1.419,61.928 -1.419,66.928 -2,67.51 -2,69.51 -1,70.51 12.5,70.51 13.5,71.51 13.5,76.01 14.5,77.01 v1(17.5,77.01)
  Bottom Layer w0.3: R10.2 -2,33.26 v1(-1.25,34.01) 0,34.01 1.5,34.01 2.05,33.46 U2.7 ; v1(17.5,77.01) JP6.1
DI+: JDI.2 R17.2 | length 12.6
  Bottom Layer w0.3: JDI.2 -12,70.02 R17.2
DI-: C11.2 D4.2 D5.1 JDI.1 | length 19.9
  Bottom Layer w0.3: JDI.1 -16,70.605 D5.1 -16,66.01 ; D4.2 -17.55,60.353 -18,60.803 -18,65.51 -17.5,66.01 -16,66.01 ; C11.2 -15.85,65.86 -16,66.01
DO1: F1.2 JDO.1 KOH.1 KOL.2 TDO.PAD | length 30.4
  Bottom Layer w0.5: JDO.1 -22,59.37 -22,53.618 ; KOL.2 -22.5,53.118 -22,53.618 ; F1.2 -16.95,43.668 -16.5,44.118 TDO.PAD -16.5,47.118 -16,47.618 -16,51.618 -16.5,52.118 -17.48,52.118 KOH.1 -17.5,53.118 -18,53.618 -22,53.618
EN: U0.27
F\A\U\L\T\1\: R4.2 U1.13 | length 12.5
  Top Layer w0.3: v1(-15,32.51) -14,32.51 -13.5,33.01 -13.5,35.01 -13,35.51 v1(-11.5,35.51)
  Bottom Layer w0.3: R4.2 v1(-15,32.51) ; v1(-11.5,35.51) -10,35.51 -9.7,35.81 U1.13
F\A\U\L\T\2\: R9.2 U2.13 | length 12.5
  Top Layer w0.3: v1(0,32.51) 1,32.51 1.5,33.01 1.5,35.01 2,35.51 v1(3.5,35.51)
  Bottom Layer w0.3: R9.2 v1(0,32.51) ; v1(3.5,35.51) 5,35.51 5.3,35.81 U2.13
GND: C1.2 C3.2 C4.2 C5.2 C6.2 C8.2 C9.2 C10.2 C12.2 C13.2 C14.2 C15.2 D7.1 D9.1 J1.3 J2.3 J3.3 JA1.2 JA2.2 JDO.2 JQi.1 JRGB.4 JSS.3 pad.0 PRS.1 R11.2 R19.2 R21.1 RS1.2 RS2.2 U0.4 U1.1 U1.14 U2.1 U2.14 U3.4
  other v1: -45,25.01 -36,29.997 -7,32.51 8,32.51 -27,33.01 -15,34.51 -2.5,35.01 -6.066,35.053 -17,42.01 32.5,42.5 -31,43.01 -4,43.01 -14,45.01 -8,45.01 28.83,47.905 1,48.01 -24,56.01 -13,57.991 15,60.01 -18,68.51
MISO: U0.13 U1.11 U2.11 | length 49.3
  Top Layer w0.3: U0.13@0.021,56.094 -1.5,54.572 -1.5,46.717 0.207,45.01 1.793,45.01 3,43.803 v1(3,41.51)
  Bottom Layer w0.3: U1.11 -11,39.51 -10,40.51 -2.434,40.51 -1.5,41.444 -1.5,54.572 U0.13@0.021,56.094 ; v1(3,41.51) 3,40.51 4,39.51 U2.11
MOSI: U0.12 U1.12 U2.12 | length 45.4
  Top Layer w0.3: U0.12 -1,51.603 -1,46.924 0.414,45.51 2,45.51 3.5,44.01 3.5,42.51 v1(4.5,41.51)
  Bottom Layer w0.3: U1.12 -10.35,39.16 -9.5,40.01 -2.227,40.01 -1,41.237 -1,51.603 U0.12 ; v1(4.5,41.51) 4.5,40.01 4.65,39.86 U2.12
NetC11_1: C11.1 D4.1 D5.2 R17.1 | length 16.3
  Bottom Layer w0.3: D4.1 -15.77,56.74 -15,57.51 -15,59.51 -16,60.51 -17,60.51 -17.5,61.01 -17.5,63.51 -17.075,63.935 D5.2 -15.075,63.935 -14.85,64.16 C11.1 -13.95,64.11 R17.1
NetC12_1: C12.1 D7.2 F2.2 RS1.1 TA1.PAD U3.3 | length 13.1
  Bottom Layer w0.3: TA1.PAD -31.05,36.047 -31.365,35.733 U3.3 ; F2.2 -29.923,36.097 -28.905,35.08 D7.2 -27.28,35.08 -26.85,35.51 C12.1 -26.85,39.03 RS1.1
NetC13_1: C13.1 D9.2 F3.2 RS2.1 TA2.PAD U3.5 | length 16
  Bottom Layer w0.3: RS2.1 -37.1,25.982 C13.1 -37.15,27.557 -36.675,28.032 D9.2 -34.773,28.032 -33.738,26.997 F3.2 -30.85,26.997 ; TA2.PAD -30.5,26.647 -30.85,26.997 ; U3.5 -30.095,27.752 -30.85,26.997
NetC15_1: C15.1 JP1.2 PRS.2 | length 42.1
  Top Layer w0.3: v1(24,40.01) 28.49,40.01 v1(28.5,40)
  Bottom Layer w0.3: JP1.2 14.1,27.95 15.953,27.95 18.003,30 22.5,30 24,31.5 v1(24,40.01) ; v1(28.5,40) 37.53,40 PRS.2 39.23,43.459 C15.1
NetD6_2: D6.2 F2.1 | length 3.8
  Bottom Layer w0.3: F2.1 -31,38.01 -30.85,37.86 -29.255,37.86 -28.905,37.51 D6.2
NetD8_2: D8.2 F3.1 | length 4.2
  Bottom Layer w0.3: D8.2 -35,25.76 -34.75,25.51 -32.825,25.51 -32.575,25.26 F3.1
NetF1_1: F1.1 Q4.3 | length 3.6
  Bottom Layer w0.5: Q4.3 -19.125,46.443 F1.1
NetJSS_2: JSS.2 Q4.2 R20.2 | length 4.2
  Bottom Layer w0.5: JSS.2 -24.375,43.743 -23.575,44.543 Q4.2 -23.45,42.543 R20.2
NetKD1_2: KD1.2 R5.1 | length 3
  Bottom Layer w0.3: KD1.2 -17.27,25.99 -17,26.26 R5.1
NetKD2_2: KD2.2 R10.1 | length 3
  Bottom Layer w0.3: KD2.2 -2.27,25.99 -2,26.26 R10.1
NetKF1_2: KF1.2 R4.1 | length 2.3
  Bottom Layer w0.3: KF1.2 -15.5,26.76 -15,27.26 R4.1
NetKF2_2: KF2.2 R9.1 | length 2.3
  Bottom Layer w0.3: KF2.2 -0.5,26.51 0,27.01 R9.1
NetKI1_2: KI1.2 R19.1 | length 3.3
  Bottom Layer w0.3: KI1.2 -10.5,62.01 -10,62.51 R19.1
NetKOH_2: KOH.2 R21.2 | length 2.5
  Bottom Layer w0.3: R21.2 -17.58,50.218 KOH.2
NetKOL_1: KOL.1 R22.1 | length 2.5
  Bottom Layer w0.3: R22.1 -22.58,50.093 KOL.1
POWER_SIGNAL: J1.2 JPP.1 R11.1 | length 27.3
  Bottom Layer w0.3: J1.2 8.098,87.327 R11.1 4.665,84.279 4,83.614 4,79.5 4.49,79.01 7.641,79.01 8.207,79.01 11.457,75.76 JPP.1
RGB_BLUE: JRGB.3 R16.1 | length 9.1
  Bottom Layer w0.3: JRGB.3 -11,86.36 -11,80.51 -10.5,80.01 R16.1
RGB_GREEN: JRGB.2 R15.1 | length 9.7
  Bottom Layer w0.3: JRGB.2 -11.5,83.445 -11.5,78.51 -11,78.01 R15.1
RGB_RED: JRGB.1 R14.1 | length 10.1
  Bottom Layer w0.3: JRGB.1 -12,80.53 -12,77.01 -11,76.01 R14.1
RST: JP1.1 U0.1 | length 3.9
  Bottom Layer w0.3: JP1.1 13.388,28.536 14.1,28.536 U0.1
SCK: U0.11 U1.10 U2.10 | length 71.3
  Top Layer w0.3: v1(1.5,41.51) 1.5,44.01 1,44.51 0,44.51 -2,46.51 -2,55.987 -0.477,57.51 2.5,57.51 3.5,56.51 3.5,52.633 U0.11
  Bottom Layer w0.3: U1.10 -11.65,39.567 -10.207,41.01 -2.642,41.01 -2,41.652 -2,55.987 -0.477,57.51 2.5,57.51 3.5,56.51 3.5,52.633 U0.11 ; v1(1.5,41.51) 1.5,40.76 1.75,40.51 2.207,40.51 3.35,39.367 U2.10
T+1: C2.2 C3.1 R3.1 U1.4 | length 8.4
  Bottom Layer w0.3: C3.1 -11.05,25.86 R3.1 -11,27.86 C2.2 -11,28.16 U1.4
T+2: C7.2 C8.1 R8.1 U2.4 | length 8.4
  Bottom Layer w0.3: C8.1 3.95,25.86 R8.1 4,27.86 C7.2 4,28.16 U2.4
T-1: C1.1 C2.1 R2.1 U1.3 | length 9
  Bottom Layer w0.3: U1.3 -10.35,30.36 -9.15,29.16 C2.1 ; R2.1 -9.15,26.06 C2.1 ; C1.1 -7.15,28.01 C2.1
T-2: C6.1 C7.1 R7.1 U2.3 | length 9
  Bottom Layer w0.3: U2.3 4.65,30.36 5.85,29.16 C7.1 ; R7.1 6,27.86 C7.1 ; C6.1 7.85,28.01 C7.1
TC1+: R3.2 TC1a.1 | length 17.6
  Bottom Layer w0.3: TC1a.1 -22.5,19.5 -21,21 -12,21 -11,22 R3.2
TC1-: R1.2 R2.2 TC1a.2 | length 17
  Bottom Layer w0.3: TC1a.2 -17.5,19.999 -17,20.5 -10.4,20.5 -9,21.9 R2.2 R1.2
TC2+: R8.2 TC2a.1 | length 19.7
  Bottom Layer w0.3: R8.2 4,21.85 5.35,20.5 16.508,20.5 17.5,19.509 TC2a.1
TC2-: R6.2 R7.2 TC2a.2 | length 24.6
  Bottom Layer w0.3: R6.2 R7.2 6,22 7,21 21,21 22.5,19.5 TC2a.2
VBAT: U0.28
pads on no net: U0.0 U0.14 U0.15 U1.6 U2.6

## Polygon pours and split planes (outlines as drawn)
GND on Top Layer "GND-Top" (solid, remove dead copper, pour order 4): -50,4.402 50,4.402 50,99.402 -50,99.402
GND on Bottom Layer "GND-Bottom" (solid, remove dead copper, pour order 3): -50,4.402 50,4.402 50,99.402 -50,99.402

## Keep-outs
Keep-Out Layer:
  lines w0.1: -49.136,29.997 ccw(c-43.291,26.643) -47.964,21.788 cw(c-50.7,14.271) -42.992,16.412 ; -49.129,30.022 -10.266,97.335 cw(c-8.89,96.733) -7.518,97.343 ccw(c0,100.079) 7.517,97.343 ; -43,16.41 -43,9.41 ccw(c-38,9.41) -33,9.41 33,9.41 ; 7.514,97.335 cw(c8.89,96.733) 10.262,97.343 11.272,95.594 11.272,95.592 8.693,94.103 14.743,83.624 17.322,85.113 49.129,30.013 ; 33.01,9.399 ccw(c38,9.399) 42.989,9.399 42.989,16.41 cw(c50.7,14.279) 47.963,21.797 ; 47.965,21.789 ccw(c43.291,26.643) 49.136,29.998

## Silkscreen, mask and mechanical layers (free items; w line width, h text height)
Top Overlay:
  drawing of 3190 lines, arcs and shapes, not listed
  text "www.stratosgroupsa.com" at 10.5,75.01 h5 r300
Bottom Overlay:
  lines w0.1: 17.25,75.51 17.5,75.26 ; 18.5,75.26 17.5,75.26 ; 20.26,75.26 17.5,75.26
  lines w0.2: -27.5,16.51 -25.5,16.51 ; -27.2,42.923 -26.7,42.923 ; -27.2,44.673 -26.7,44.673 ; -26.95,44.423 -26.95,44.923 ; -26.5,15.51 -26.5,17.51 ; -26.45,42.673 -26.45,42.173 ; -26.45,43.423 -26.45,42.173 ; -26.2,42.173 -26.45,42.173 ; -26.2,43.923 -26.45,43.923 -26.45,45.423 -26.2,45.423 ; -14.5,16.51 -12.5,16.51 ; -5,22.51 -5,39.01 ; 12.5,16.51 14.5,16.51 ; 13.5,15.51 13.5,17.51 ; 25.5,16.51 27.5,16.51 ; 33.268,25.5 35,26.5 ; 36.13,20.966 37.862,21.966 ; 36.496,22.332 37.496,20.6
  text "Stratos Group SAS" at 7.5,12.51 h2.5
  text "info@stratosgroupsa.com" at 7.5,11.26 h2
  text "LoRaTC v1.4 @Apr2020" at 7.5,10.01 h2
Bottom Solder:
  region: 1561 vertices and 1 holes, not listed, extent -27.2,23.587 -21.825,29.73
Mechanical 1:
  circle w0.5: c38,9.01 r2.73
  circle w0.5: c-38,9.01 r2.73
  circle w0.5: c0,88.379 r2.764
  circle w0.1: c0,88.379 r0.025
  lines w0.5: -49.136,30.006 ccw(c-43.291,26.652) -47.964,21.797 cw(c-50.7,14.279) -42.99,16.413 ; -49.129,30.014 -10.266,97.326 cw(c-8.89,96.725) -7.518,97.335 ccw(c0,100.071) 7.517,97.335 ; -43,16.403 -43,9.41 ccw(c-38,9.41) -33,9.41 33,9.41 ; -38,4.402 38,4.402 ; 0,-0.99 0,1.01 ; 7.514,97.326 cw(c8.89,96.725) 10.262,97.335 ; 10.261,97.334 49.136,30.001 ; 33.01,9.41 ccw(c38,9.41) 42.989,9.41 42.989,16.41 ; 42.991,16.41 cw(c50.7,14.271) 47.963,21.788 ; 47.965,21.789 ccw(c43.289,26.646) 49.136,30.001 ; -22.093,31.038 -1.236,74.834 0.881,73.84 27.326,18.912 25.124,17.947 -0.401,70.965 -19.906,30.011 -22.093,31.038
  lines w1: -45,0.01 cw(c-45,15.598) -58.5,23.393 -13.5,101.335 cw(c0,93.541) 13.5,101.335 58.5,23.393 cw(c45,15.598) 45,0.01 ; -45,0.01 45,0.01 ; -56.422,22.192 ccw(c-45,15.598) -45,2.41 45,2.41 ccw(c45,15.598) 56.421,22.192 11.421,100.135 ccw(c0,93.541) -11.422,100.135 -56.422,22.192
  text "Enclosure scale: 0.78" at 32,102.379 h3
  text "Expected height: 110 mm" at 32,100.379 h3
  text "Material: ASA" at 32,98.379 h3
Mechanical 15:
  lines w0.2: 12.513,97.389 13.013,96.523 9.549,94.523 15.549,84.131 19.013,86.131 19.513,85.265 ; 46.452,39.092 47.19,37.814 ; 52.626,28.251 53.388,26.931
Mechanical 31:
  region: -35,13.01 0,73.632 -18.187,84.132 -53.187,23.51

## Dimensions
-38,4.402 to -8.89,98.227 on Mechanical 1
0,109.129 to -45,0.01 on Mechanical 1
-60.589,15.598 to 60.588,15.598 on Mechanical 1
50.03,26.643 to -50.03,26.652 on Mechanical 1
-8.89,98.235 to -45,0.01 on Mechanical 1